# Altium PCB PCB_SMD.PcbDoc
Units mil, origin at the board's own origin, x right, y up, seen from the top; angles counter-clockwise.
Board outline 2386.81 x 2619.09 mil, 2 copper layers (Top Layer, Bottom Layer); 156 components, 34 nets, 411 pads, 42 vias.
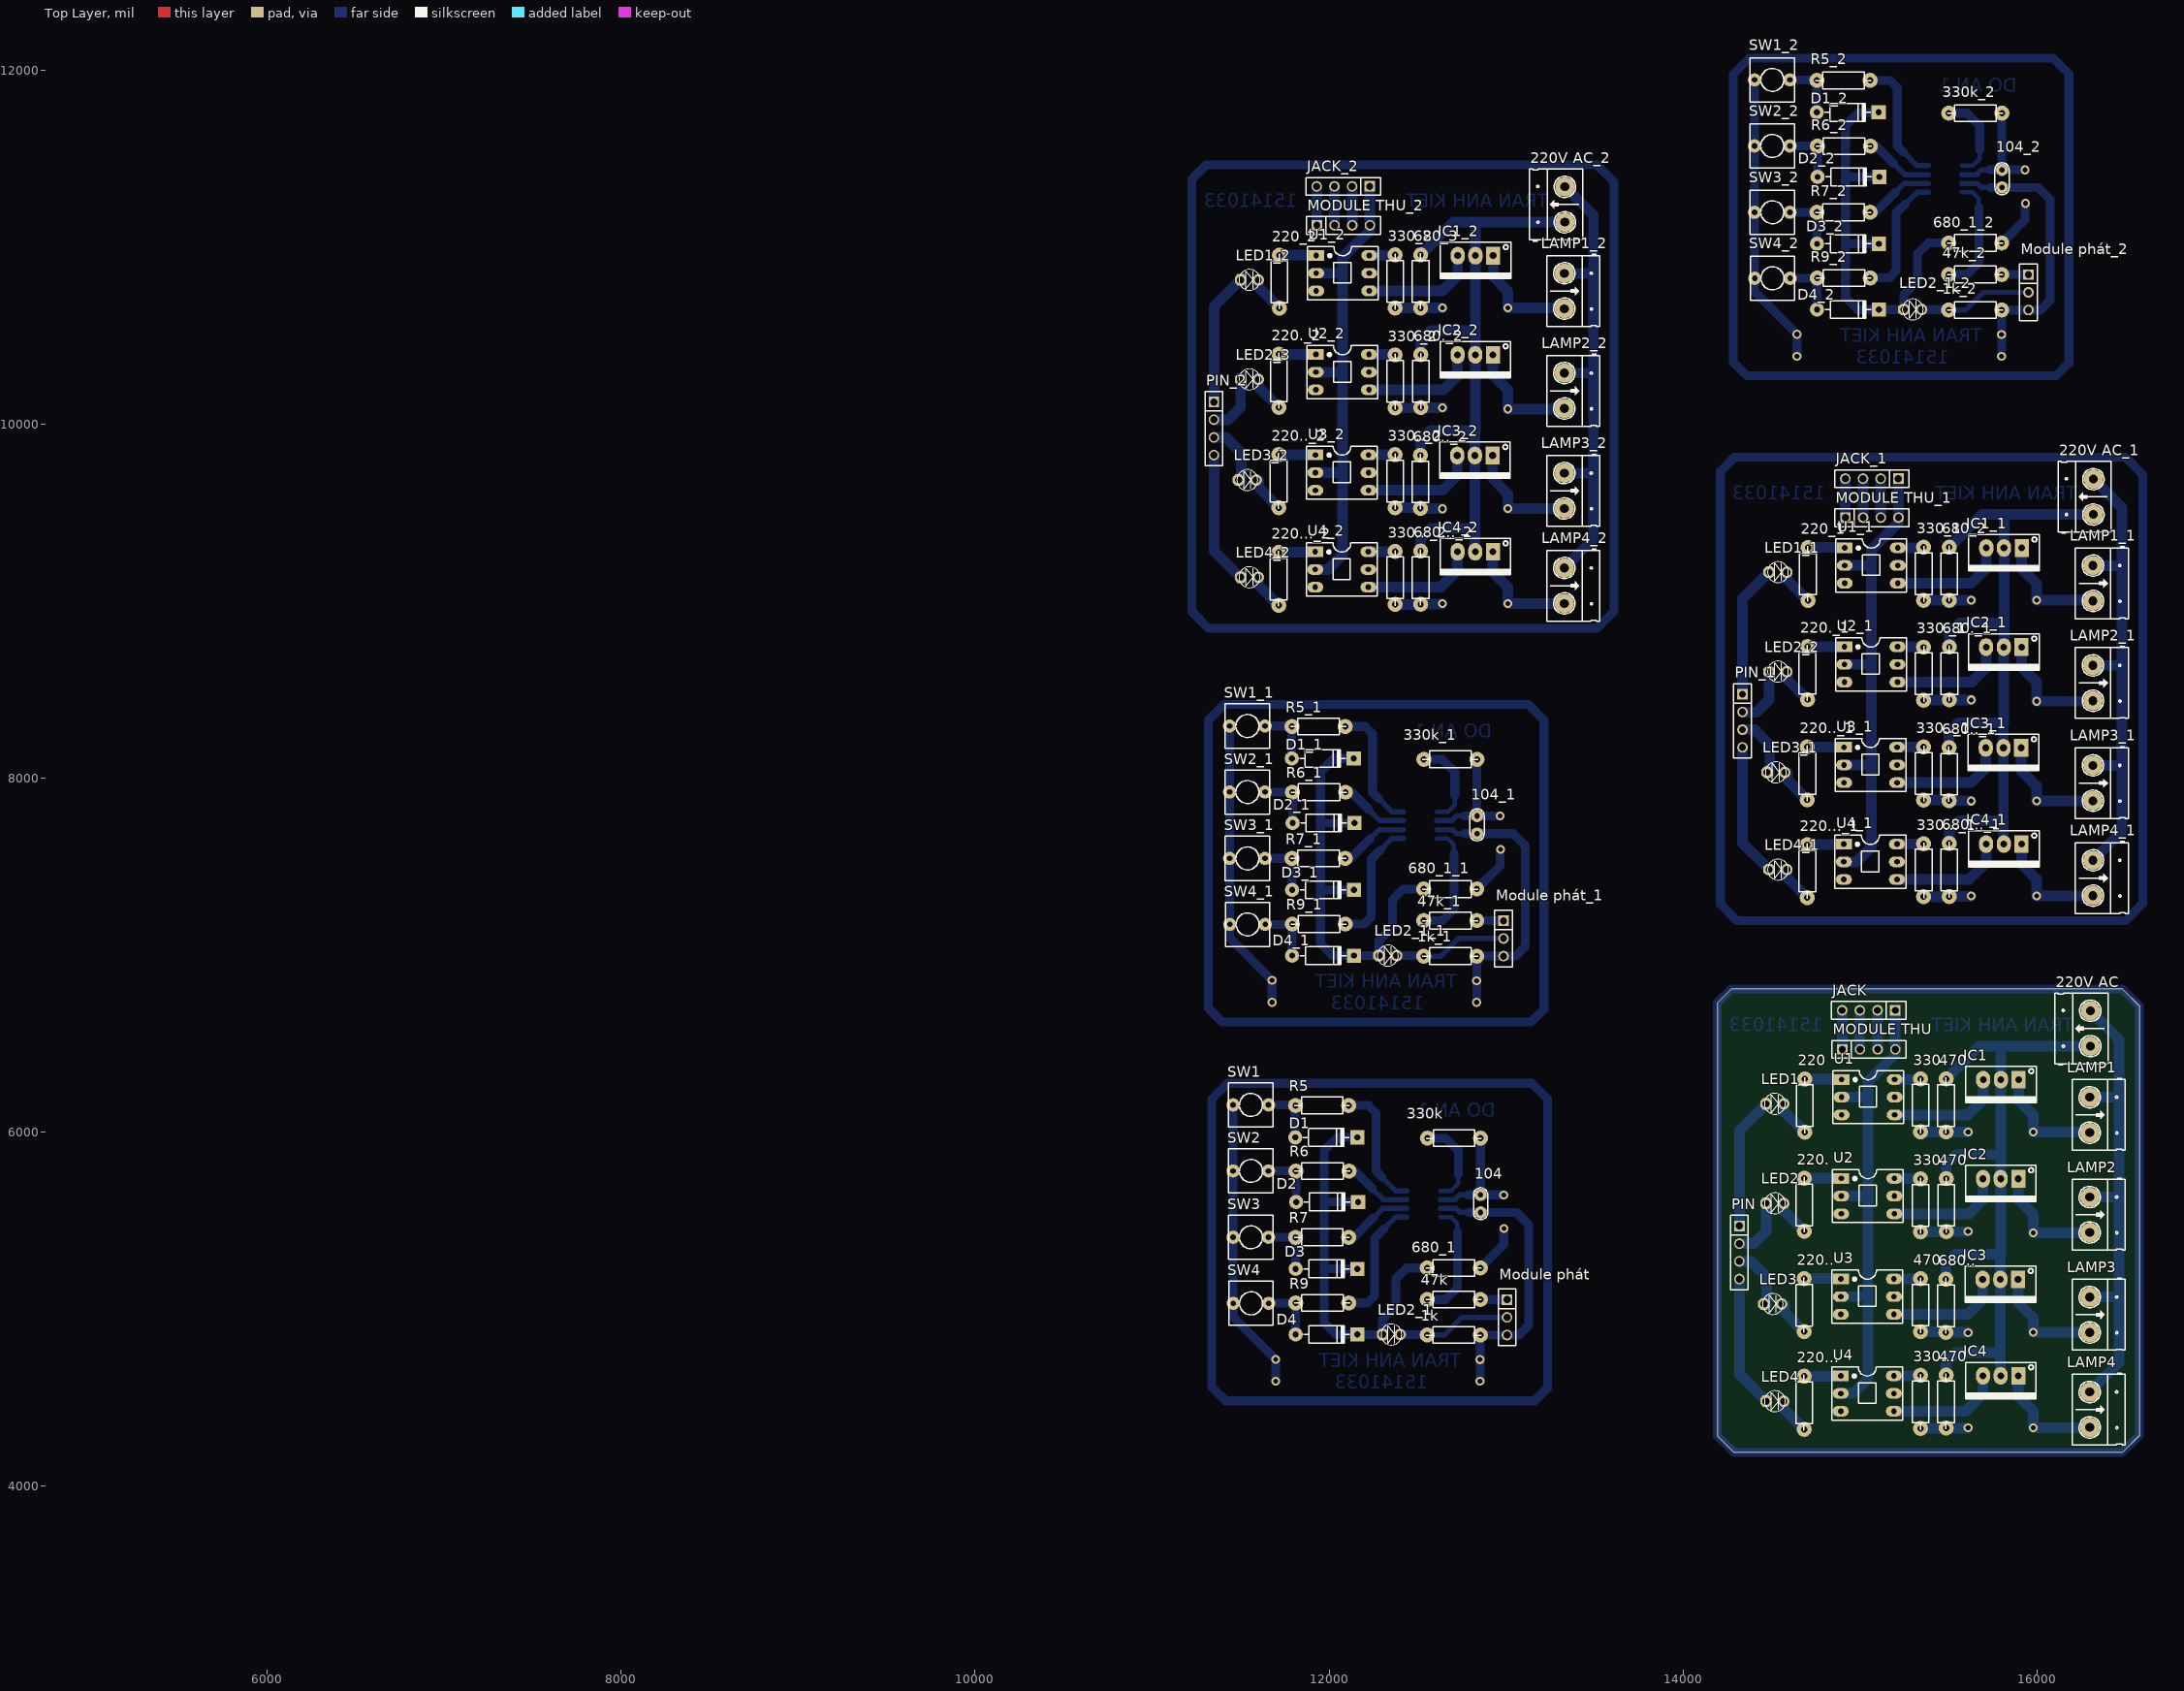
[diagram p0: Top Layer view]
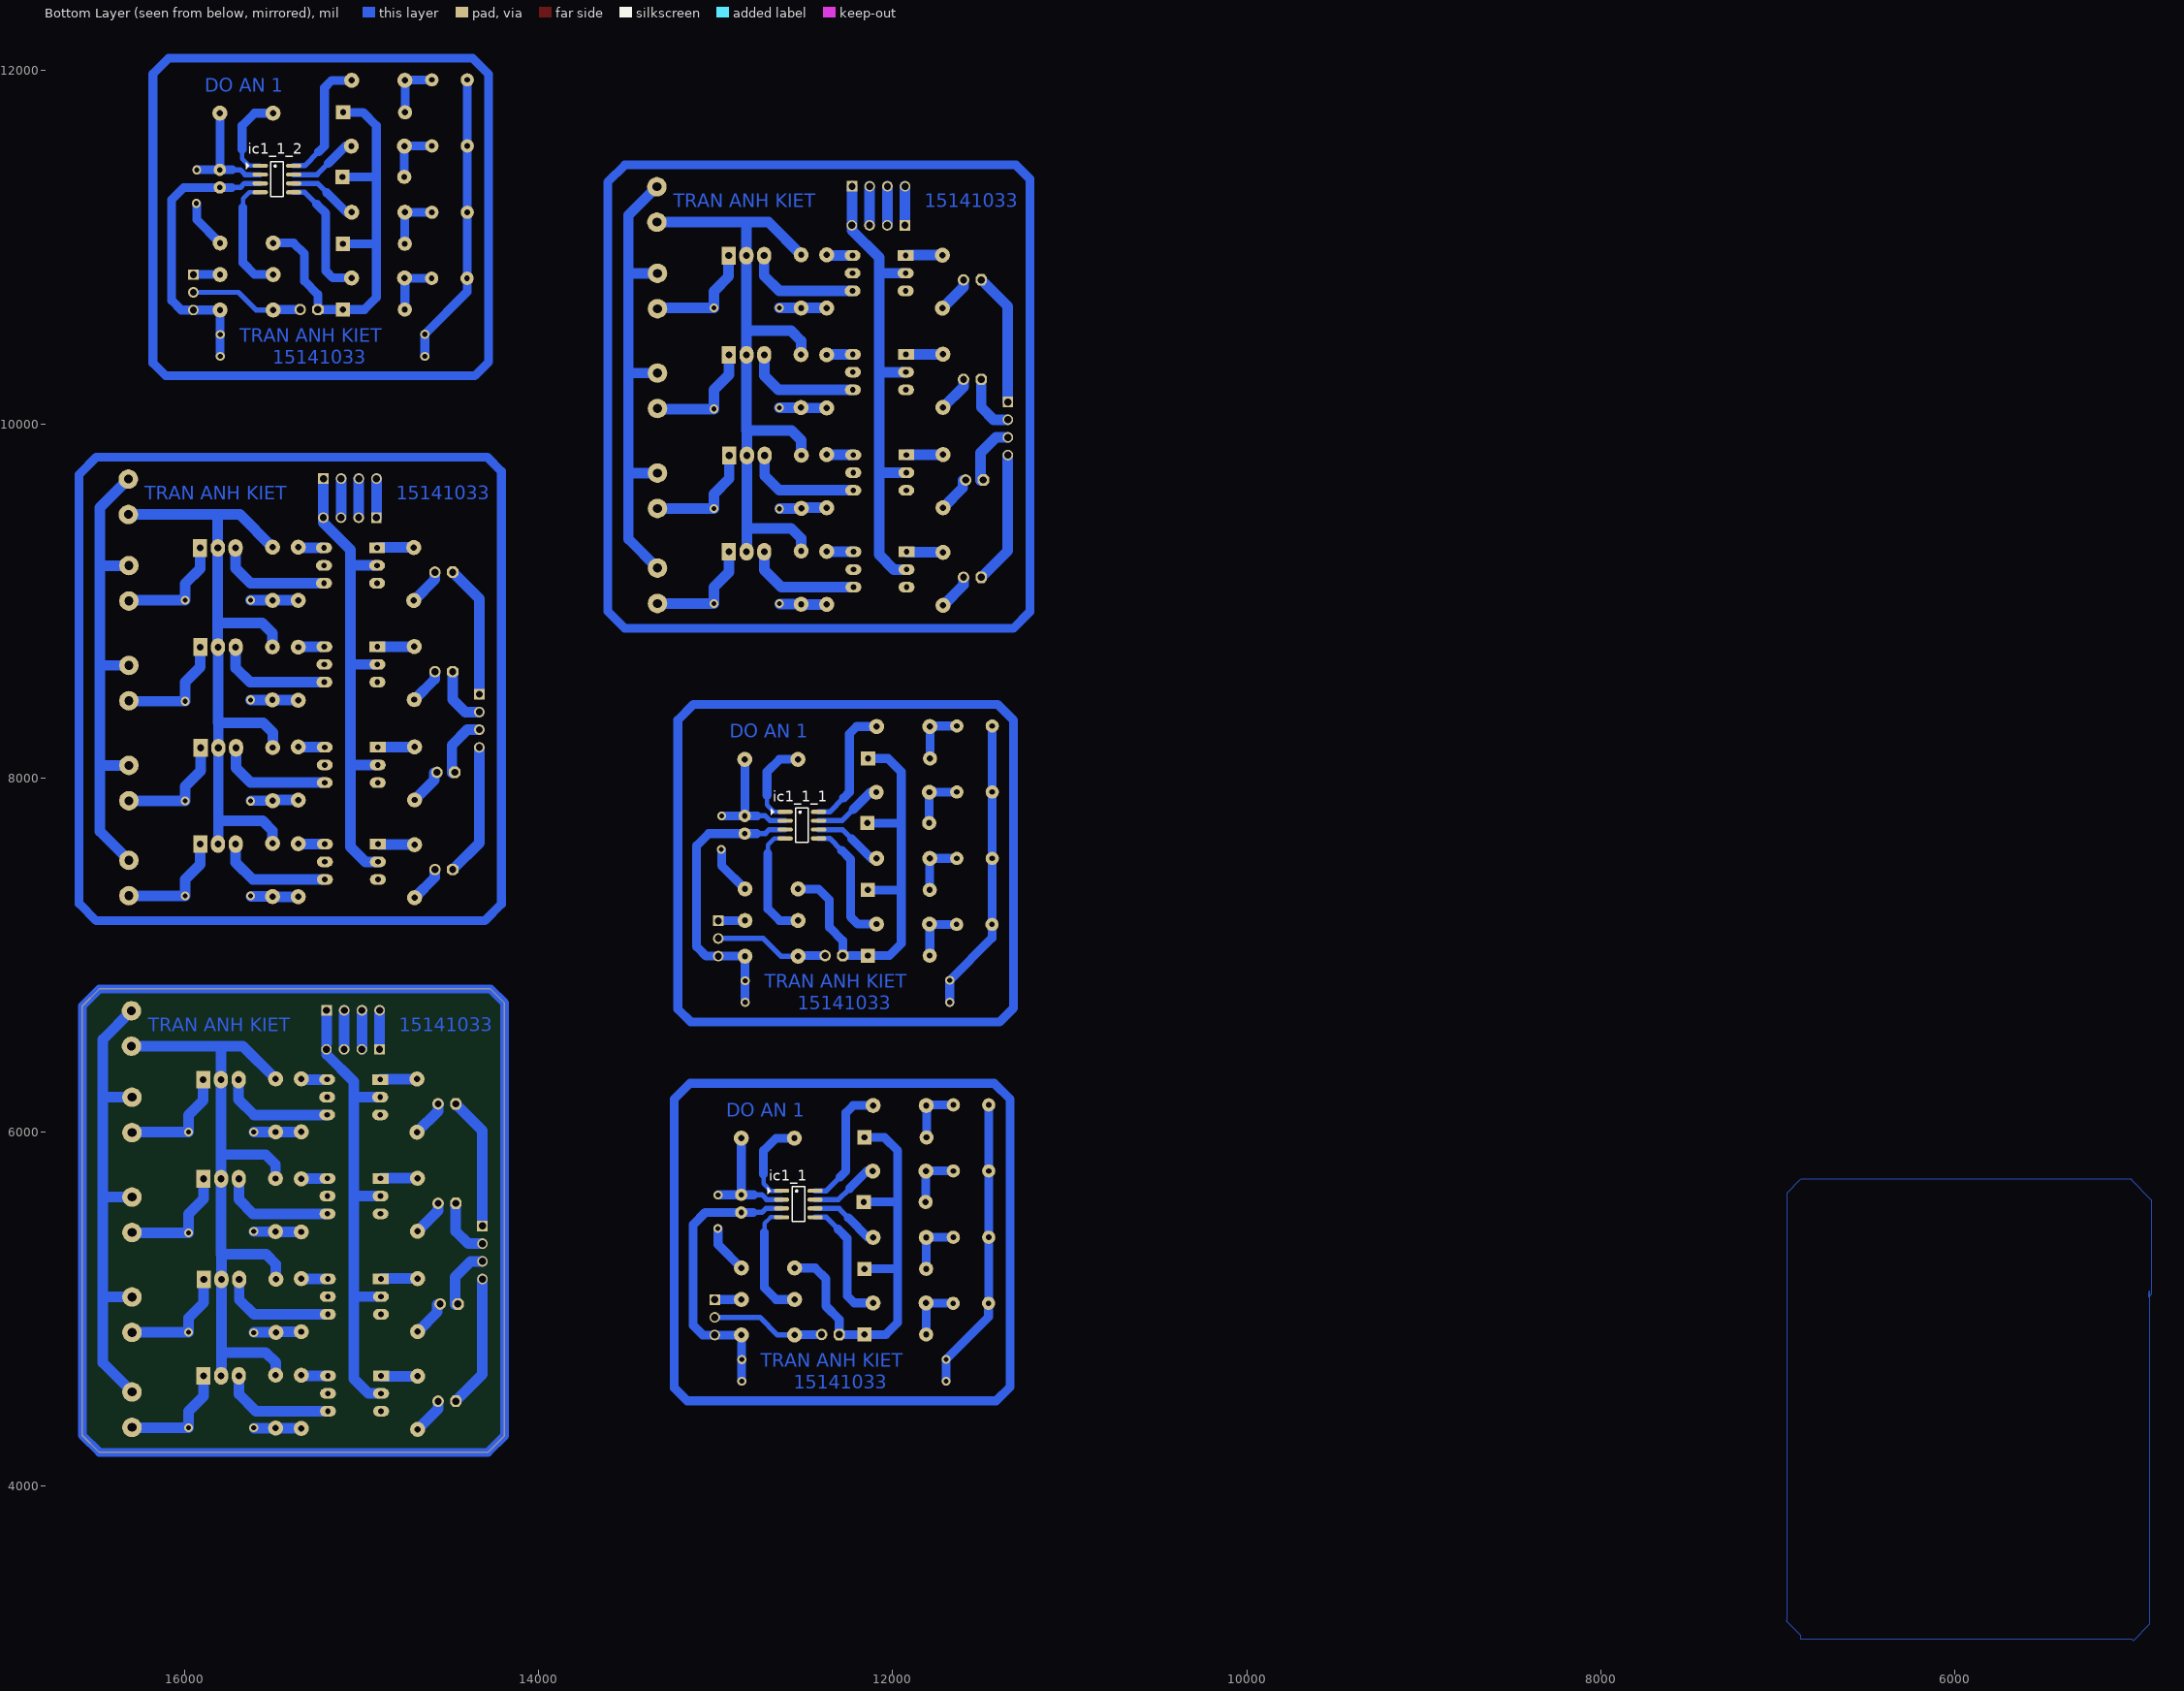
[diagram p1: Bottom Layer view, seen from below]

## Layer stack, top to bottom
Top Layer: signal copper 1.4
Dielectric: dielectric 12.6, FR-4, Dk 4.8
Bottom Layer: signal copper 1.4

## Board outline
14193.9,4284.45 14288.39,4189.96 16483.27,4189.96 16580.71,4287.4 16580.71,6711.61 16483.27,6809.06 14273.62,6809.06 14193.9,6729.33

## Design rules (kind name [scope] priority, off if disabled: settings)
Clearance [All] p1: gap=10
PlaneClearance [All] p1: clearance=50
PolygonConnect [All] p1: connectstyle=Relief reliefconductorwidth=10 reliefentries=4 polygonreliefangle="90 Angle"
RoomDefinition SCH_SMD [InComponentClass('SCH_SMD')] p1: confinementstyle=ConfineIn formatcopy=TRUE lockcomponents=FALSE outline 7103.19,1034.81 16018.19,1034.81 16018.19,2034.81 7103.19,2034.81
RoutingVias [All] p1: holewidth=28 width=50 viastyle="Through Hole" minholewidth=28 minwidth=50 maxholewidth=28 maxwidth=50
SilkscreenOverComponentPads [All] p1: minsilkscreentomaskgap=10
SolderMaskExpansion [All] p1: expansion=4
Width [All] p1: maxlimit=60 minlimit=10 preferedwidth=50
26 further rules are at their usual default settings.

## Classes and differential pairs
component class SCH_SMD: 220 220. 220.. 220... "220V AC" 330 330. 330... 470 680.. IC1 IC2 IC3 IC4 JACK LAMP1 LAMP2 LAMP3 LAMP4 LED1 LED2 LED4 "MODULE THU" PIN U1 U2 U3 U4

## Components (designator, comment, footprint, x,y, rotation, side; value= is the part's Value field where it differs from the comment)
1k "Res" RES-1/4W-SMALL 12694.88,4853.35 r0 top
1k_1 "Res" RES-1/4W-SMALL 12675.2,6994.1 r0 top (schematic designator 1k)
1k_2 "Res" RES-1/4W-SMALL 15641.73,10644.69 r0 top (schematic designator 1k)
47k "Res" RES-1/4W-SMALL 12694.88,5054.13 r0 top
47k_1 "Res" RES-1/4W-SMALL 12675.2,7194.88 r0 top (schematic designator 47k)
47k_2 "Res" RES-1/4W-SMALL 15641.73,10845.47 r0 top (schematic designator 47k)
104 "104" CN1 12856.3,5645.67 r270 top
104_1 "104" CN1 12836.61,7786.42 r270 top (schematic designator 104)
104_2 "104" CN1 15803.15,11437.01 r270 top (schematic designator 104)
220 "Res" RES-1/4W-SMALL 14688.98,6159.45 r270 top
220. "Res" RES-1/4W-SMALL 14686.02,5599.41 r270 top
220.. "Res" RES-1/4W-SMALL 14685.04,5032.48 r270 top
220... "Res" RES-1/4W-SMALL 14685.04,4480.31 r270 top
220..._1 "Res" RES-1/4W-SMALL 14702.76,7484.25 r270 top (schematic designator 220...)
220..._2 "Res" RES-1/4W-SMALL 11715.55,9135.83 r270 top (schematic designator 220...)
220.._1 "Res" RES-1/4W-SMALL 14702.76,8036.42 r270 top (schematic designator 220..)
220.._2 "Res" RES-1/4W-SMALL 11715.55,9687.99 r270 top (schematic designator 220..)
220._1 "Res" RES-1/4W-SMALL 14703.74,8603.35 r270 top (schematic designator 220.)
220._2 "Res" RES-1/4W-SMALL 11716.54,10254.92 r270 top (schematic designator 220.)
220_1 "Res" RES-1/4W-SMALL 14706.69,9163.39 r270 top (schematic designator 220)
220_2 "Res" RES-1/4W-SMALL 11719.49,10814.96 r270 top (schematic designator 220)
"220V AC" "Header 2_1" HED2 16302.17,6485.24 r90 top
"220V AC_1" "Header 2_1" HED2 16319.88,9489.17 r90 top (schematic designator "220V AC")
"220V AC_2" "Header 2_1" HED2 13332.68,11140.75 r90 top (schematic designator "220V AC")
330 "Res" RES-1/4W-SMALL 15342.52,6140.75 r90 top
330. "Res" RES-1/4W-SMALL 15342.52,5575.79 r90 top
330... "Res" RES-1/4W-SMALL 15342.52,4465.55 r90 top
330..._1 "Res" RES-1/4W-SMALL 15360.24,7469.49 r90 top (schematic designator 330...)
330..._2 "Res" RES-1/4W-SMALL 12373.03,9121.06 r90 top (schematic designator 330...)
330.._1 "Res" RES-1/4W-SMALL 15360.24,8015.75 r90 top (schematic designator 330..)
330.._2 "Res" RES-1/4W-SMALL 12373.03,9667.32 r90 top (schematic designator 330..)
330._1 "Res" RES-1/4W-SMALL 15360.24,8579.72 r90 top (schematic designator 330.)
330._2 "Res" RES-1/4W-SMALL 12373.03,10231.3 r90 top (schematic designator 330.)
330_1 "Res" RES-1/4W-SMALL 15360.24,9144.69 r90 top (schematic designator 330)
330_2 "Res" RES-1/4W-SMALL 12373.03,10796.26 r90 top (schematic designator 330)
330k "Res" RES-1/4W-SMALL 12695.87,5965.55 r0 top
330k_1 "Res" RES-1/4W-SMALL 12676.18,8106.3 r0 top (schematic designator 330k)
330k_2 "Res" RES-1/4W-SMALL 15642.72,11756.89 r0 top (schematic designator 330k)
470 "Res" RES-1/4W-SMALL 15342.52,5011.81 r90 top (schematic designator 330..)
470 "Res" RES-1/4W-SMALL 15488.19,5597.44 r270 top (schematic designator 680.)
470 "Res" RES-1/4W-SMALL 15487.21,4487.2 r270 top (schematic designator 680...)
470 "Res" RES-1/4W-SMALL 15487.21,6160.43 r270 top (schematic designator 680)
680.. "Res" RES-1/4W-SMALL 15486.22,5028.54 r270 top
680..._1 "Res" RES-1/4W-SMALL 15504.92,7491.14 r270 top (schematic designator 680...)
680..._2 "Res" RES-1/4W-SMALL 12517.72,9142.72 r270 top (schematic designator 680...)
680.._1 "Res" RES-1/4W-SMALL 15503.94,8032.48 r270 top (schematic designator 680..)
680.._2 "Res" RES-1/4W-SMALL 12516.73,9684.06 r270 top (schematic designator 680..)
680._1 "Res" RES-1/4W-SMALL 15505.91,8601.38 r270 top (schematic designator 680.)
680._2 "Res" RES-1/4W-SMALL 12518.7,10252.95 r270 top (schematic designator 680.)
680_1 "Res" RES-1/4W-SMALL 12694.88,5232.28 r0 top (schematic designator 680)
680_1_1 "Res" RES-1/4W-SMALL 12675.2,7373.03 r0 top (schematic designator 680)
680_1_2 "Res" RES-1/4W-SMALL 15641.73,11023.62 r0 top (schematic designator 680)
680_2 "Res" RES-1/4W-SMALL 15504.92,9164.37 r270 top (schematic designator 680)
680_3 "Res" RES-1/4W-SMALL 12517.72,10815.95 r270 top (schematic designator 680)
D1 "1N4007" D1A 11809.06,5969.89 r180 top
D1_1 "1N4007" D1A 11789.37,8110.63 r180 top (schematic designator D1)
D1_2 "1N4007" D1A 14755.91,11761.23 r180 top (schematic designator D1)
D2 "1N4007" D1A 11813.98,5605.32 r180 top
D2_1 "1N4007" D1A 11794.29,7746.06 r180 top (schematic designator D2)
D2_2 "1N4007" D1A 14760.83,11396.65 r180 top (schematic designator D2)
D3 "1N4007" D1A 11811.02,5227.36 r180 top
D3_1 "1N4007" D1A 11791.34,7368.11 r180 top (schematic designator D3)
D3_2 "1N4007" D1A 14757.87,11018.7 r180 top (schematic designator D3)
D4 "1N4007" D1A 11811.02,4856.3 r180 top
D4_1 "1N4007" D1A 11791.34,6997.05 r180 top (schematic designator D4)
D4_2 "1N4007" D1A 14757.87,10647.64 r180 top (schematic designator D4)
IC1 "BTA16" QTO-220 15896.65,6296.26 r180 top
IC1_1 "BTA16" QTO-220 15914.37,9300.2 r180 top (schematic designator IC1)
ic1_1 "ev1527" SO-8 12533.46,5593.5 r180 bottom (schematic designator ic1)
ic1_1_1 "ev1527" SO-8 12513.78,7734.25 r180 bottom (schematic designator ic1)
ic1_1_2 "ev1527" SO-8 15480.32,11384.84 r180 bottom (schematic designator ic1)
IC1_2 "BTA16" QTO-220 12927.17,10951.77 r180 top (schematic designator IC1)
IC2 "BTA16" QTO-220 15895.67,5736.22 r180 top
IC2_1 "BTA16" QTO-220 15913.39,8740.16 r180 top (schematic designator IC2)
IC2_2 "BTA16" QTO-220 12926.18,10391.73 r180 top (schematic designator IC2)
IC3 "BTA16" QTO-220 15893.7,5167.32 r180 top
IC3_1 "BTA16" QTO-220 15911.42,8171.26 r180 top (schematic designator IC3)
IC3_2 "BTA16" QTO-220 12924.21,9822.83 r180 top (schematic designator IC3)
IC4 "BTA16" QTO-220 15895.67,4623.03 r180 top
IC4_1 "BTA16" QTO-220 15913.39,7626.97 r180 top (schematic designator IC4)
IC4_2 "BTA16" QTO-220 12926.18,9278.54 r180 top (schematic designator IC4)
JACK "JP4" JP4-C1T 15199.8,6687.99 r180 top
JACK_1 "JP4" JP4-C1T 15217.52,9691.93 r180 top (schematic designator JACK)
JACK_2 "JP4" JP4-C1T 12230.32,11343.5 r180 top (schematic designator JACK)
LAMP1 "Header 2_1" HED2 16299.21,6196.85 r270 top
LAMP1_1 "Header 2_1" HED2 16316.93,9200.79 r270 top (schematic designator LAMP1)
LAMP1_2 "Header 2_1" HED2 13329.72,10852.36 r270 top (schematic designator LAMP1)
LAMP2 "Header 2_1" HED2 16299.21,5632.87 r270 top
LAMP2_1 "Header 2_1" HED2 16316.93,8636.81 r270 top (schematic designator LAMP2)
LAMP2_2 "Header 2_1" HED2 13329.72,10288.39 r270 top (schematic designator LAMP2)
LAMP3 "Header 2_1" HED2 16299.21,5067.91 r270 top
LAMP3_1 "Header 2_1" HED2 16316.93,8071.85 r270 top (schematic designator LAMP3)
LAMP3_2 "Header 2_1" HED2 13329.72,9723.43 r270 top (schematic designator LAMP3)
LAMP4 "Header 2_1" HED2 16299.21,4531.5 r270 top
LAMP4_1 "Header 2_1" HED2 16316.93,7535.43 r270 top (schematic designator LAMP4)
LAMP4_2 "Header 2_1" HED2 13329.72,9187.01 r270 top (schematic designator LAMP4)
LED1 "LED" LED-3MM-YELLOW 14469.49,6159.45 r0 top
LED1_1 "LED" LED-3MM-YELLOW 14487.2,9163.39 r0 top (schematic designator LED1)
LED1_2 "LED" LED-3MM-YELLOW 11500,10814.96 r0 top (schematic designator LED1)
LED2 "LED" LED-3MM-YELLOW 14469.49,5597.44 r0 top
LED2_1 "LED" LED-3MM-YELLOW 12302.17,4856.3 r0 top (schematic designator LED2)
LED2_1_1 "LED" LED-3MM-YELLOW 12282.48,6997.05 r0 top (schematic designator LED2)
LED2_1_2 "LED" LED-3MM-YELLOW 15249.02,10647.64 r0 top (schematic designator LED2)
LED2_2 "LED" LED-3MM-YELLOW 14487.2,8601.38 r0 top (schematic designator LED2)
LED2_3 "LED" LED-3MM-YELLOW 11500,10252.95 r0 top (schematic designator LED2)
LED3 "LED" LED-3MM-YELLOW 14457.68,5028.54 r0 top
LED3_1 "LED" LED-3MM-YELLOW 14475.39,8032.48 r0 top (schematic designator LED3)
LED3_2 "LED" LED-3MM-YELLOW 11488.19,9684.06 r0 top (schematic designator LED3)
LED4 "LED" LED-3MM-YELLOW 14469.49,4479.33 r0 top
LED4_1 "LED" LED-3MM-YELLOW 14487.2,7483.27 r0 top (schematic designator LED4)
LED4_2 "LED" LED-3MM-YELLOW 11500,9134.84 r0 top (schematic designator LED4)
"Module phát" "JP3" JP3-C1T 13005.91,5053.15 r270 top
"Module phát_1" "JP3" JP3-C1T 12986.22,7193.9 r270 top (schematic designator "Module phát")
"Module phát_2" "JP3" JP3-C1T 15952.76,10844.49 r270 top (schematic designator "Module phát")
"MODULE THU" "JP4" JP4-C1T 14900.59,6467.52 r0 top
"MODULE THU_1" "JP4" JP4-C1T 14918.31,9471.46 r0 top (schematic designator "MODULE THU")
"MODULE THU_2" "JP4" JP4-C1T 11931.1,11123.03 r0 top (schematic designator "MODULE THU")
PIN "JP4" JP4-C1T 14318.9,5469.49 r270 top
PIN_1 "JP4" JP4-C1T 14336.61,8473.43 r270 top (schematic designator PIN)
PIN_2 "JP4" JP4-C1T 11349.41,10125 r270 top (schematic designator PIN)
R5 "Res" RES-1/4W-SMALL 11950.79,6150.59 r0 top
R5_1 "Res" RES-1/4W-SMALL 11931.1,8291.34 r0 top (schematic designator R5)
R5_2 "Res" RES-1/4W-SMALL 14897.64,11941.93 r0 top (schematic designator R5)
R6 "Res" RES-1/4W-SMALL 11952.76,5779.53 r0 top
R6_1 "Res" RES-1/4W-SMALL 11933.07,7920.28 r0 top (schematic designator R6)
R6_2 "Res" RES-1/4W-SMALL 14899.61,11570.87 r0 top (schematic designator R6)
R7 "Res" RES-1/4W-SMALL 11950.79,5405.51 r0 top
R7_1 "Res" RES-1/4W-SMALL 11931.1,7546.26 r0 top (schematic designator R7)
R7_2 "Res" RES-1/4W-SMALL 14897.64,11196.85 r0 top (schematic designator R7)
R9 "Res" RES-1/4W-SMALL 11951.77,5034.45 r0 top
R9_1 "Res" RES-1/4W-SMALL 11932.09,7175.2 r0 top (schematic designator R9)
R9_2 "Res" RES-1/4W-SMALL 14898.62,10825.79 r0 top (schematic designator R9)
SW1 "" SW2 11657.7,6153.52 r180 top
SW1_1 "" SW2 11638.01,8294.27 r180 top (schematic designator SW1)
SW1_2 "" SW2 14604.55,11944.86 r180 top (schematic designator SW1)
SW2 "" SW2 11657.7,5780.49 r180 top
SW2_1 "" SW2 11638.01,7921.23 r180 top (schematic designator SW2)
SW2_2 "" SW2 14604.55,11571.82 r180 top (schematic designator SW2)
SW3 "" SW2 11657.7,5405.49 r180 top
SW3_1 "" SW2 11638.01,7546.23 r180 top (schematic designator SW3)
SW3_2 "" SW2 14604.55,11196.82 r180 top (schematic designator SW3)
SW4 "" SW2 11658.68,5032.45 r180 top
SW4_1 "" SW2 11639,7173.2 r180 top (schematic designator SW4)
SW4_2 "" SW2 14605.53,10823.79 r180 top (schematic designator SW4)
U1 "MOC3021" DIP6/W0.3 14896.65,6297.24 r270 top
U1_1 "MOC3021" DIP6/W0.3 14914.37,9301.18 r270 top (schematic designator U1)
U1_2 "MOC3021" DIP6/W0.3 11927.17,10952.76 r270 top (schematic designator U1)
U2 "MOC3021" DIP6/W0.3 14894.69,5738.19 r270 top
U2_1 "MOC3021" DIP6/W0.3 14912.4,8742.13 r270 top (schematic designator U2)
U2_2 "MOC3021" DIP6/W0.3 11925.2,10393.7 r270 top (schematic designator U2)
U3 "MOC3021" DIP6/W0.3 14892.72,5170.28 r270 top
U3_1 "MOC3021" DIP6/W0.3 14910.43,8174.21 r270 top (schematic designator U3)
U3_2 "MOC3021" DIP6/W0.3 11923.23,9825.79 r270 top (schematic designator U3)
U4 "MOC3021" DIP6/W0.3 14891.73,4623.03 r270 top
U4_1 "MOC3021" DIP6/W0.3 14909.45,7626.97 r270 top (schematic designator U4)
U4_2 "MOC3021" DIP6/W0.3 11922.24,9278.54 r270 top (schematic designator U4)

## Footprints (in the part's own frame and the unit in brackets; to place one, negate y for a bottom-side part, rotate by r counter-clockwise, add the part's x,y. Pads: shape width x height; smd on the part's side, far side on the other; paste and mask are expansions set on the pad)
CN1 [mil]
  round 70 hole 31: 1(0,0) 2(100,0)
  silkscreen extent -40,-40 141,40, body extent -60,-30 170,37, height 265
D1A [mil] "Diode 1A, W 100mil, L 350mil"
  round 80 hole 35: 1(0,0)
  rect 80x80 hole 35: 2(-350,0)
  silkscreen extent -305,-50 -45,50, body extent -386,-33 34,36, height 84
DIP6/W0.3 [mil] "6 PIN, W 300mil, Pin to pin 100mil"
  rect 60x90 hole 31.5: 1(0,0)
  oval 60x90 hole 31.5: 2(100,0) 3(200,0) 4(200,300) 5(100,300) 6(0,300)
  silkscreen extent -50,-50 250,350, body extent -58,-7 260,307, height 170
HED2 [mil] "Header 2, 2 pin, hight 300mil, Pin to Pin 200, Colour Green"
  round 110 hole 50: 1(0,0) 2(200,0)
  silkscreen extent -106,-100 300,200, body extent -92,-140 302,155, height 394
JP3-C1T [mm] "3 row, straight, gold plating"
  rect 1.52x1.52 hole 1.02: 1(0,0)
  round 1.52 hole 1.02: 2(2.54,0) 3(5.08,0)
  silkscreen extent -1.52,-1.27 6.6,1.27, body extent -1.52,-1.25 6.6,1.25, height 8.51
JP4-C1T [mm] "4 row, straight, gold plating"
  rect 1.52x1.52 hole 1.02: 1(0,0)
  round 1.52 hole 1.02: 2(2.54,0) 3(5.08,0) 4(7.62,0)
  silkscreen extent -1.52,-1.27 9.14,1.27, body extent -1.52,-1.25 9.14,1.25, height 8.51
LED-3MM-YELLOW [mil]
  oct 65x65 hole 40: 1(0,0)
  round 65 hole 40: 2(100,0)
  silkscreen extent -9,-59 109,59, body extent -27,-77 117,80, height 181
QTO-220 [mil] "TO-220 - 1-2-3"
  rect 80x100 hole 39: 1(0,0)
  oval 80x100 hole 39: 2(100,0) 3(200,0)
  silkscreen extent -100,-76 300,130, body extent -119,-64 322,121, height 755
RES-1/4W-SMALL [mil]
  round 85 hole 35: 1(-140,0) 2(160,0)
  silkscreen extent -148,-47 166,47, body extent -152,-47 172,47, height 97
SO-8 [mm] "8-Pin Small Outline Integrated Circuit 1.27 mm Pitch, IPC Medium Density"
  oval 2.2x0.6 smd: 1(-2.4,1.905) 2(-2.4,0.635) 3(-2.4,-0.635) 4(-2.4,-1.905) 5(2.4,-1.905) 6(2.4,-0.635) 7(2.4,0.635) 8(2.4,1.905)
  silkscreen extent -4.44,-2.5 0.9,2.5, body extent -2.93,-2.51 3.08,2.49, height 1.75
SW2 [mil] "SW button 2pin, 250x 250 mil"
  round 75 hole 31: 1(0,0) 2(200,0)
  silkscreen extent -25,-125 225,125

## Part data
104 104_1 104_2: library part CN1, "Cap np  1pF - 472pF"
"220V AC" "220V AC_1" "220V AC_2" LAMP1 LAMP1_1 LAMP1_2 LAMP2 LAMP2_1 LAMP2_2 LAMP3 LAMP3_1 LAMP3_2 LAMP4 LAMP4_1 LAMP4_2: "Header, 2-Pin"
D1 D1_1 D1_2 D2 D2_1 D2_2 D3 D3_1 D3_2 D4 D4_1 D4_2: library part D1A, "Diode 1A"
IC1 IC1_1 IC1_2 IC2 IC2_1 IC2_2 IC3 IC3_1 IC3_2 IC4 IC4_1 IC4_2: library part BT137, "Triacs - 8A"
ic1_1 ic1_1_1 ic1_1_2: library part FDS4435A, "P-Channel Logic Level PowerTrench MOSFET"
JACK JACK_1 JACK_2 "Module phát" "Module phát_1" "Module phát_2" "MODULE THU" "MODULE THU_1" "MODULE THU_2" PIN PIN_1 PIN_2: "WR-PHD 2.54 mm Angled Socket Header"
LED1 LED1_1 LED1_2 LED2 LED2_1 LED2_1_1 LED2_1_2 LED2_2 LED2_3 LED3 LED3_1 LED3_2 LED4 LED4_1 LED4_2: "LED Single colour Green and Red"
SW1 SW1_1 SW1_2 SW2 SW2_1 SW2_2 SW3 SW3_1 SW3_2 SW4 SW4_1 SW4_2: library part SW2, "Switch button 2 pin"
U1 U1_1 U1_2 U2 U2_1 U2_2 U3 U3_1 U3_2 U4 U4_1 U4_2: "Single Opto"

## Via types
v1: diameter 50, hole 28, Top Layer to Bottom Layer, 42 vias

## Nets (pads, with @x,y where several pads share a name; then routed paths per layer and width w, separated by ;. In a path a pad name is that pad's centre, name@x,y a point inside that pad or via, vN(x,y) a via of type N, cw(c..) or ccw(c..) an arc to the next point about the centre after c; other vN are vias at no path point)
GND: "MODULE THU.4" JACK.1 U1.2 U2.2 U3.2 U4.2 | length 2973.2
  Bottom Layer w60: U4.2 14962.99,4523.03 15046.26,4606.3 15046.26,5070.28 ; U3.2 15046.26,5070.28 ; U2.2 15046.26,5638.19 ; U1.2 15041.93,6197.24 ; 15199.8,6499.03 JACK.1 ; JACK.1@15200.59,6687.2 15200.59,6467.52 15200.59,6439.76 15046.26,6285.43 15046.26,5638.19 ; 15046.26,5070.28 15046.26,5638.19
Net104_1: IC4.1 LAMP4.2 | length 645.5
  Bottom Layer w60: IC4.1 15895.67,4507.87 15980.32,4423.23 v1(15980.32,4329.72) LAMP4.2@16297.44,4329.72
Net104_2: 330....1 470.2@15487.21,4327.2 | length 264.5
  Bottom Layer w60: 330....1 470.2@15485.55,4325.55 ; 470.2@15487.21,4327.2 v1@15608.7,4327.2
  other v1: 15611.22,4329.72
Net220..._1: 220....1 U4.1 | length 207.8
  Bottom Layer w60: 220....1 14889.02,4620.31 U4.1
Net220..._2: 220....2 LED4.2 | length 206.9
  Bottom Layer w60: LED4.2 14569.49,4435.87 220....2
Net220.._1: 220...1 U3.1 | length 205.5
  Bottom Layer w60: 220...1 U3.1@14890.51,5172.48
Net220.._2: 220...2 LED3.2 | length 199.3
  Bottom Layer w60: LED3.2@14573.43,5025.59 14573.43,4984.09 220...2
Net220._1: 220..1 U2.1 | length 207.4
  Bottom Layer w60: 220..1 U2.1@14893.46,5739.41
Net220._2: 220..2 LED2.2 | length 206.3
  Bottom Layer w60: LED2.2 14569.49,5555.94 220..2
Net220_1: 220.1 U1.1 | length 205.5
  Bottom Layer w60: 220.1 U1.1@14894.45,6299.45
Net220_2: 220.2 LED1.2 | length 209.5
  Bottom Layer w60: LED1.2 14569.49,6118.94 220.2
"Net220V AC_1": 470.1@15487.21,4627.2 470.1@15487.21,6300.43 470.1@15488.19,5737.44 680...1 "220V AC.1" IC1.2 IC2.2 IC3.2 IC4.2 | length 3978.7
  Bottom Layer w60: 680...1 15486.22,5253.94 15541.34,5309.06 15795.67,5309.06 IC2.2 ; 470.1@15487.21,4627.2 15487.21,4698.82 15543.31,4754.92 15793.7,4754.92 ; 470.1@15487.21,6300.43 15672.01,6485.24 16302.17,6485.24 ; 470.1@15488.19,5737.44 15488.19,5815.94 15545.28,5873.03 15796.65,5873.03 IC2.2@15796.65,5737.2 ; 15793.7,5307.09 IC3.2 15793.7,4754.92 ; IC4.2 15793.7,4625 15793.7,4754.92 ; 15796.65,5875 IC1.2 15796.65,6484.65
"Net220V AC_2": "220V AC.2" LAMP1.1 LAMP2.1 LAMP3.1 LAMP4.1 | length 2778.8
  Bottom Layer w60: LAMP4.1 16463.58,4695.87 16463.58,5632.87 ; LAMP3.1 16462.6,5067.91 ; LAMP2.1 16463.58,5632.87 ; LAMP1.1 16461.61,6196.85 ; 16302.17,6685.24 16463.58,6523.82 16463.58,5632.87
Net330..._2: 330....2 U4.6 | length 148.3
  Bottom Layer w60: U4.6 330....2@15340,4623.03
Net330.._1: 470.1@15342.52,4871.81 680...2 | length 265.2
  Bottom Layer w60: 470.1@15342.52,4871.81 680...2@15482.95,4871.81 ; 680...2@15484.69,4870.08 680...2 v1@15608.82,4868.54
  other v1: 15611.22,4866.14
Net330.._2: 470.2@15342.52,5171.81 U3.6 | length 150.4
  Bottom Layer w60: U3.6 15340.98,5170.28 470.2@15342.52,5171.81
Net330._1: 330..1 470.2@15488.19,5437.44 | length 268.8
  Bottom Layer w60: 330..1 15486.54,5435.79 15488.19,5437.44 v1@15610.67,5437.44
  other v1: 15611.22,5437.99
Net330._2: 330..2 U2.6 | length 145.4
  Bottom Layer w60: U2.6 330..2@15340.12,5738.19
Net330_1: 330.1 470.2@15487.21,6000.43 | length 268.4
  Bottom Layer w60: 330.1 470.2@15486.89,6000.75 ; 470.2@15487.21,6000.43 v1(15611.22,6000.43)
Net330_2: 330.2 U1.6 | length 147.3
  Bottom Layer w60: U1.6 15339.02,6297.24 330.2
NetIC1_1: IC1.1 LAMP1.2 | length 645.8
  Bottom Layer w60: IC1.1 15896.65,6179.13 15980.32,6095.47 v1(15980.32,6000.43) LAMP1.2@16295.63,6000.43
NetIC1_3: IC1.3 U1.4 | length 648.9
  Bottom Layer w60: U1.4 15611.02,6097.24 15696.65,6182.87 IC1.3
NetIC2_1: IC2.1 LAMP2.2 | length 657.3
  Bottom Layer w60: IC2.1 15895.67,5623.03 15980.32,5538.39 v1(15980.32,5430.12) LAMP2.2@16296.46,5430.12
NetIC2_3: IC2.3 U2.4 | length 651.7
  Bottom Layer w60: U2.4 15614.96,5538.19 15695.67,5618.9 IC2.3
NetIC3_1: IC3.1 LAMP3.2 | length 653.8
  Bottom Layer w60: IC3.1 15893.7,5036.42 15980.32,4949.8 v1(15980.32,4868.11) LAMP3.2@16299.02,4868.11
NetIC3_3: IC3.3 U3.4 | length 649.6
  Bottom Layer w60: U3.4 15611.02,4970.28 15693.7,5052.95 IC3.3
NetIC4_3: IC4.3 U4.4 | length 647.4
  Bottom Layer w60: U4.4 15599.21,4423.03 15695.67,4519.49 IC4.3
NetJACK_2: "MODULE THU.3" JACK.2 | length 219.7
  Bottom Layer w60: 15099.8,6468.31 JACK.2
NetJACK_3: "MODULE THU.2" JACK.3 | length 219.7
  Bottom Layer w60: 14999.8,6468.31 JACK.3
NetJACK_4: "MODULE THU.1" JACK.4 | length 219.7
  Bottom Layer w60: 14899.8,6468.31 JACK.4
NetLED1_1: LED1.1 PIN.1 | length 752.3
  Bottom Layer w60: PIN.1 14318.9,6008.86 LED1.1
NetLED2_1: LED2.1 PIN.2 | length 337.3
  Bottom Layer w60: PIN.2 14399.02,5369.49 14469.49,5439.96 LED2.1
NetLED3_1: LED3.1 PIN.3 | length 347.2
  Bottom Layer w60: PIN.3 14386.02,5269.49 14473.43,5182.09 LED3.1@14473.43,5025.59
NetLED4_1: LED4.1 PIN.4 | length 752.5
  Bottom Layer w60: PIN.4 14318.9,4629.92 LED4.1
pads on no net: 1k.1 1k.2 1k_1.1 1k_1.2 1k_2.1 1k_2.2 47k.1 47k.2 47k_1.1 47k_1.2 47k_2.1 47k_2.2 104.1 104.2 104_1.1 104_1.2 104_2.1 104_2.2 220..._1.1 220..._1.2 220..._2.1 220..._2.2 220.._1.1 220.._1.2 220.._2.1 220.._2.2 220._1.1 220._1.2 220._2.1 220._2.2 220_1.1 220_1.2 220_2.1 220_2.2 330..._1.1 330..._1.2 330..._2.1 330..._2.2 330.._1.1 330.._1.2 330.._2.1 330.._2.2 330._1.1 330._1.2 330._2.1 330._2.2 330_1.1 330_1.2 330_2.1 330_2.2 330k.1 330k.2 330k_1.1 330k_1.2 330k_2.1 330k_2.2 680..._1.1 680..._1.2 680..._2.1 680..._2.2 680.._1.1 680.._1.2 680.._2.1 680.._2.2 680._1.1 680._1.2 680._2.1 680._2.2 680_1.1 680_1.2 680_1_1.1 680_1_1.2 680_1_2.1 680_1_2.2 680_2.1 680_2.2 680_3.1 680_3.2 "220V AC_1.1" "220V AC_1.2" "220V AC_2.1" "220V AC_2.2" "Module phát.1" "Module phát.2" "Module phát.3" "Module phát_1.1" "Module phát_1.2" "Module phát_1.3" "Module phát_2.1" "Module phát_2.2" "Module phát_2.3" "MODULE THU_1.1" "MODULE THU_1.2" "MODULE THU_1.3" "MODULE THU_1.4" "MODULE THU_2.1" "MODULE THU_2.2" "MODULE THU_2.3" "MODULE THU_2.4" D1.1 D1.2 D1_1.1 D1_1.2 D1_2.1 D1_2.2 D2.1 D2.2 D2_1.1 D2_1.2 D2_2.1 D2_2.2 D3.1 D3.2 D3_1.1 D3_1.2 D3_2.1 D3_2.2 D4.1 D4.2 D4_1.1 D4_1.2 D4_2.1 D4_2.2 IC1_1.1 ic1_1.1 IC1_1.2 ic1_1.2 ic1_1.3 IC1_1.3 ic1_1.4 ic1_1.5 ic1_1.6 ic1_1.7 ic1_1.8 ic1_1_1.1 ic1_1_1.2 ic1_1_1.3 ic1_1_1.4 ic1_1_1.5 ic1_1_1.6 ic1_1_1.7 ic1_1_1.8 ic1_1_2.1 ic1_1_2.2 ic1_1_2.3 ic1_1_2.4 ic1_1_2.5 ic1_1_2.6 ic1_1_2.7 ic1_1_2.8 IC1_2.1 IC1_2.2 IC1_2.3 IC2_1.1 IC2_1.2 IC2_1.3 IC2_2.1 IC2_2.2 IC2_2.3 IC3_1.1 IC3_1.2 IC3_1.3 IC3_2.1 IC3_2.2 IC3_2.3 IC4_1.1 IC4_1.2 IC4_1.3 IC4_2.1 IC4_2.2 IC4_2.3 JACK_1.1 JACK_1.2 JACK_1.3 JACK_1.4 JACK_2.1 JACK_2.2 JACK_2.3 JACK_2.4 LAMP1_1.1 LAMP1_1.2 LAMP1_2.1 LAMP1_2.2 LAMP2_1.1 LAMP2_1.2 LAMP2_2.1 LAMP2_2.2 LAMP3_1.1 LAMP3_1.2 LAMP3_2.1 LAMP3_2.2 LAMP4_1.1 LAMP4_1.2 LAMP4_2.1 LAMP4_2.2 LED1_1.1 LED1_1.2 LED1_2.1 LED1_2.2 LED2_1.1 LED2_1.2 LED2_1_1.1 LED2_1_1.2 LED2_1_2.1 LED2_1_2.2 LED2_2.1 LED2_2.2 LED2_3.1 LED2_3.2 LED3_1.1 LED3_1.2 LED3_2.1 LED3_2.2 LED4_1.1 LED4_1.2 LED4_2.1 LED4_2.2 PIN_1.1 PIN_1.2 PIN_1.3 PIN_1.4 PIN_2.1 PIN_2.2 PIN_2.3 PIN_2.4 R5.1 R5.2 R5_1.1 R5_1.2 R5_2.1 R5_2.2 R6.1 R6.2 R6_1.1 R6_1.2 R6_2.1 R6_2.2 R7.1 R7.2 R7_1.1 R7_1.2 R7_2.1 R7_2.2 R9.1 R9.2 R9_1.1 R9_1.2 R9_2.1 R9_2.2 SW1.1 SW1.2 SW1_1.1 SW1_1.2 SW1_2.1 SW1_2.2 SW2.1 SW2.2 SW2_1.1 SW2_1.2 SW2_2.1 SW2_2.2 SW3.1 SW3.2 SW3_1.1 SW3_1.2 SW3_2.1 SW3_2.2 SW4.1 SW4.2 SW4_1.1 SW4_1.2 SW4_2.1 SW4_2.2 U1.3 U1.5 U1_1.1 U1_1.2 U1_1.3 U1_1.4 U1_1.5 U1_1.6 U1_2.1 U1_2.2 U1_2.3 U1_2.4 U1_2.5 U1_2.6 U2.3 U2.5 U2_1.1 U2_1.2 U2_1.3 U2_1.4 U2_1.5 U2_1.6 U2_2.1 U2_2.2 U2_2.3 U2_2.4 U2_2.5 U2_2.6 U3.3 U3.5 U3_1.1 U3_1.2 U3_1.3 U3_1.4 U3_1.5 U3_1.6 U3_2.1 U3_2.2 U3_2.3 U3_2.4 U3_2.5 U3_2.6 U4.3 U4.5 U4_1.1 U4_1.2 U4_1.3 U4_1.4 U4_1.5 U4_1.6 U4_2.1 U4_2.2 U4_2.3 U4_2.4 U4_2.5 U4_2.6
copper on no net: | length 130303.1
  Bottom Layer w25: 12608.27,7659.25 12670.47,7659.25 12705.71,7624.02 12705.71,7573.82 ; 12608.27,7809.25 12671.46,7809.25 12710.63,7848.43 12710.63,7902.56 ; 12627.95,5518.5 12690.16,5518.5 12725.39,5483.27 12725.39,5433.07 ; 12627.95,5668.5 12691.14,5668.5 12730.32,5707.68 12730.32,5761.81 ; 15574.8,11309.84 15637.01,11309.84 15672.24,11274.61 15672.24,11224.41 ; 15574.8,11459.84 15637.99,11459.84 15677.17,11499.02 15677.17,11553.15
  Bottom Layer w30: 12224.41,7821.85 12287.01,7759.25 12419.29,7759.25 ; 12231.79,7656.99 12284.06,7709.25 12419.29,7709.25 ; 12244.09,5681.1 12306.69,5618.5 12438.98,5618.5 ; 12251.48,5516.24 12303.74,5568.5 12438.98,5568.5 ; 12278.05,7887.3 12356.1,7809.25 12419.29,7809.25 ; 12288.88,7592.03 12356.1,7659.25 12419.29,7659.25 ; 12297.74,5746.56 12375.79,5668.5 12438.98,5668.5 ; 12308.56,5451.28 12375.79,5518.5 12438.98,5518.5 ; 12503.7,6994.1 12535.2,6994.1 12631.89,6994.1 12731.69,7093.9 12986.22,7093.9 ; 12523.38,4853.35 12554.88,4853.35 12651.57,4853.35 12751.37,4953.15 13005.91,4953.15 ; 12608.27,7709.25 12697.24,7709.25 12720.08,7686.42 12768.7,7686.42 ; 12608.27,7759.25 12693.31,7759.25 12720.47,7786.42 12765.75,7786.42 ; 12627.95,5568.5 12716.93,5568.5 12739.76,5545.67 12788.39,5545.67 ; 12627.95,5618.5 12712.99,5618.5 12740.16,5645.67 12785.43,5645.67 ; 15190.95,11472.44 15253.54,11409.84 15385.83,11409.84 ; 15198.33,11307.58 15250.59,11359.84 15385.83,11359.84 ; 15244.59,11537.89 15322.64,11459.84 15385.83,11459.84 ; 15255.41,11242.62 15322.64,11309.84 15385.83,11309.84 ; 15470.23,10644.69 15501.73,10644.69 15598.42,10644.69 15698.22,10744.49 15952.76,10744.49 ; 15574.8,11359.84 15663.78,11359.84 15686.61,11337.01 15735.24,11337.01 ; 15574.8,11409.84 15659.84,11409.84 15687.01,11437.01 15732.28,11437.01
  Bottom Layer w50: 11438.01,7174.19 11438.01,7546.23 11438.01,7921.23 11438.01,8294.27 ; 11439,7173.2 11439,7096.44 v1(11678.15,6857.28) v1(11678.15,6733.27) ; 11457.7,5033.44 11457.7,5405.49 11457.7,5780.49 11457.7,6153.52 ; 11458.68,5032.45 11458.68,4955.69 v1(11697.83,4716.54) v1(11697.83,4592.52) ; 11626.97,7169.29 11627.95,7168.31 ; 11638.01,7546.23 11791.08,7546.23 11791.1,7368.35 ; 11638.01,7921.23 11792.11,7921.23 11793.07,7920.28 11794.29,7919.06 11794.29,7746.06 ; 11638.01,8294.27 11788.18,8294.27 11789.37,8293.07 11789.37,8110.63 ; 11639,7173.2 11790.09,7173.2 11790.09,6998.29 ; 11646.65,5028.54 11647.64,5027.56 ; 11657.7,5405.49 11810.76,5405.49 ; 11657.7,5780.49 11811.8,5780.49 11812.76,5779.53 11813.98,5778.31 11813.98,5605.32 ; 11657.7,6153.52 11807.86,6153.52 11809.06,6152.32 11809.06,5969.89 ; 11658.68,5032.45 11809.78,5032.45 11809.78,4857.55 ; 11810.79,5227.6 11810.79,5405.51 ; 11953.74,7746.06 12144.29,7746.06 ; 11955.71,7368.11 12141.34,7368.11 ; 11973.43,5605.32 12163.98,5605.32 ; 11975.39,5227.36 12161.02,5227.36 ; 12091.1,7546.26 12121.06,7546.26 12231.79,7656.99 ; 12091.1,8291.34 12203.74,8291.34 12245.08,8250 12245.08,7920.28 12278.05,7887.3 ; 12092.09,7175.2 12197.83,7175.2 12238.19,7215.55 12238.19,7541.34 12288.88,7592.03 ; 12093.07,7920.28 12125.98,7920.28 12224.41,7821.85 ; 12110.79,5405.51 12140.75,5405.51 12251.48,5516.24 ; 12110.79,6150.59 12223.43,6150.59 12264.76,6109.25 12264.76,5779.53 12297.74,5746.56 ; 12111.77,5034.45 12217.52,5034.45 12257.87,5074.8 12257.87,5400.59 12308.56,5451.28 ; 12112.76,5779.53 12145.67,5779.53 12244.09,5681.1 ; 12139.37,8110.63 12026.97,8110.63 11951.77,8035.43 11951.77,7064.96 12019.69,6997.05 12141.34,6997.05 12282.48,6997.05 12282.48,7081.69 12358.27,7157.48 12358.27,7312.01 12419.29,7373.03 12535.2,7373.03 ; 12159.06,5969.89 12046.66,5969.89 11971.46,5894.69 11971.46,4924.21 12039.37,4856.3 12161.02,4856.3 12302.17,4856.3 12302.17,4940.95 12377.95,5016.73 12377.95,5171.26 12438.98,5232.28 12554.88,5232.28 ; 12382.48,6997.05 12534.21,6997.05 ; 12402.17,4856.3 12553.9,4856.3 ; 12535.2,7194.88 12639.76,7194.88 12705.71,7260.83 12705.71,7573.82 ; 12536.18,8106.3 12639.76,8106.3 12710.63,8035.43 12710.63,7902.56 ; 12554.88,5054.13 12659.45,5054.13 12725.39,5120.08 12725.39,5433.07 ; 12555.87,5965.55 12659.45,5965.55 12730.32,5894.69 12730.32,5761.81 ; 12765.75,7786.42 12836.61,7786.42 v1@12966.54,7786.42 ; 12768.7,7686.42 12836.61,7686.42 13039.96,7686.42 13108.27,7618.11 13108.27,7048.23 13054.13,6994.1 12835.2,6994.1 v1@12835.2,6734.8 ; 12785.43,5645.67 12856.3,5645.67 v1@12986.22,5645.67 ; 12788.39,5545.67 12856.3,5545.67 13059.65,5545.67 13127.95,5477.36 13127.95,4907.48 13073.82,4853.35 12854.88,4853.35 v1@12854.88,4594.06 ; 12835.2,7194.88 12985.24,7194.88 ; 12835.2,7373.03 12967.52,7505.35 ; 12836.18,7786.85 12836.18,8106.3 ; 12854.88,5054.13 13004.92,5054.13 ; 12854.88,5232.28 12987.2,5364.61 ; 12855.87,5646.1 12855.87,5965.55 ; v1@12967.52,7577.76 12967.52,7505.35 ; v1@12967.52,7595.47 12967.52,7505.35 ; v1@12987.2,5437.01 12987.2,5364.61 ; v1@12987.2,5454.72 12987.2,5364.61 ; 14404.55,10824.78 14404.55,11196.82 14404.55,11571.82 14404.55,11944.86 ; 14405.53,10823.79 14405.53,10747.03 v1(14644.69,10507.87) v1(14644.69,10383.86) ; 14593.5,10819.88 14594.49,10818.9 ; 14604.55,11196.82 14757.61,11196.82 ; 14604.55,11571.82 14758.65,11571.82 14759.61,11570.87 14760.83,11569.65 14760.83,11396.65 ; 14604.55,11944.86 14754.71,11944.86 14755.91,11943.66 14755.91,11761.23 ; 14605.53,10823.79 14756.63,10823.79 14756.63,10648.89 ; 14757.64,11018.94 14757.64,11196.85 ; 14920.28,11396.65 15110.83,11396.65 ; 14922.24,11018.7 15107.87,11018.7 ; 15057.64,11196.85 15087.6,11196.85 15198.33,11307.58 ; 15057.64,11941.93 15170.28,11941.93 15211.61,11900.59 15211.61,11570.87 15244.59,11537.89 ; 15058.62,10825.79 15164.37,10825.79 15204.72,10866.14 15204.72,11191.93 15255.41,11242.62 ; 15059.61,11570.87 15092.52,11570.87 15190.95,11472.44 ; 15105.91,11761.23 14993.51,11761.23 14918.31,11686.02 14918.31,10715.55 14986.22,10647.64 15107.87,10647.64 15249.02,10647.64 15249.02,10732.28 15324.8,10808.07 15324.8,10962.6 15385.83,11023.62 15501.73,11023.62 ; 15349.02,10647.64 15500.75,10647.64 ; 15501.73,10845.47 15606.3,10845.47 15672.24,10911.42 15672.24,11224.41 ; 15502.72,11756.89 15606.3,11756.89 15677.17,11686.02 15677.17,11553.15 ; 15732.28,11437.01 15803.15,11437.01 v1@15933.07,11437.01 ; 15735.24,11337.01 15803.15,11337.01 16006.5,11337.01 16074.8,11268.7 16074.8,10698.82 16020.67,10644.69 15801.73,10644.69 v1@15801.73,10385.39 ; 15801.73,10845.47 15951.77,10845.47 ; 15801.73,11023.62 15934.06,11155.95 ; 15802.72,11437.44 15802.72,11756.89 ; v1@15934.06,11228.35 15934.06,11155.95 ; v1@15934.06,11246.06 15934.06,11155.95 ; 11224.41,8939.96 11224.41,10458.66 11224.41,11384.84 11304.13,11464.57 13513.78,11464.57 13611.22,11367.13 13611.22,8942.91 13513.78,8845.47 11318.9,8845.47 11224.41,8939.96 ; 11316.93,6701.77 11316.93,8325.79 11407.48,8416.34 13125.98,8416.34 13214.57,8327.76 13214.57,6694.88 13141.73,6622.05 11396.65,6622.05 11316.93,6701.77 ; 11336.61,4561.02 11416.34,4481.3 13161.42,4481.3 13234.25,4554.13 13234.25,6187.01 13145.67,6275.59 11427.17,6275.59 11336.61,6185.04 11336.61,4561.02 ; 14193.9,4284.45 14288.39,4189.96 16483.27,4189.96 16580.71,4287.4 16580.71,6711.61 16483.27,6809.06 14273.62,6809.06 14193.9,6729.33 14193.9,5803.15 14193.9,4284.45 ; 14211.61,7288.39 14211.61,8807.09 14211.61,9733.27 14291.34,9812.99 16500.99,9812.99 16598.43,9715.55 16598.43,7291.34 16500.98,7193.9 14306.1,7193.9 14211.61,7288.39 ; 14283.47,10352.36 14283.47,11976.38 14374.02,12066.93 16092.52,12066.93 16181.1,11978.35 16181.1,10345.47 16108.27,10272.64 14363.19,10272.64 14283.47,10352.36
  Bottom Layer w60: 11349.41,9825 11349.41,9285.43 11500,9134.84 ; 11349.41,9925 11416.54,9925 11503.94,9837.6 11503.94,9681.1 ; 11349.41,10025 11429.53,10025 11500,10095.47 11500,10252.95 ; 11349.41,10125 11349.41,10664.37 11500,10814.96 ; 11600,9134.84 11600,9091.38 11715.55,8975.83 ; 11600,10252.95 11600,10211.46 11716.54,10094.92 ; 11600,10814.96 11600,10774.45 11719.49,10654.96 ; 11603.94,9681.1 11603.94,9639.61 11715.55,9527.99 ; 11715.55,9275.83 11919.53,9275.83 11922.24,9278.54 ; 11715.55,9827.99 11921.02,9827.99 ; 11716.54,10394.92 11923.98,10394.92 ; 11719.49,10954.96 11924.96,10954.96 ; 11922.24,9178.54 11993.5,9178.54 12076.77,9261.81 12076.77,9725.79 ; 11923.23,9725.79 12076.77,9725.79 ; 11925.2,10293.7 12076.77,10293.7 ; 11927.17,10852.76 12072.44,10852.76 ; 11930.32,11123.82 11930.32,11343.5 ; 12030.32,11123.82 12030.32,11343.5 ; 12130.32,11123.82 12130.32,11343.5 ; 12222.24,9078.54 12629.72,9078.54 12726.18,9175 12726.18,9278.54 ; 12222.24,9278.54 12370.51,9278.54 ; 12223.23,9625.79 12641.54,9625.79 12724.21,9708.46 12724.21,9822.83 ; 12223.23,9825.79 12371.5,9825.79 12373.03,9827.32 ; 12225.2,10193.7 12645.47,10193.7 12726.18,10274.41 12726.18,10391.73 ; 12225.2,10393.7 12370.63,10393.7 ; 12227.17,10752.76 12641.54,10752.76 12727.17,10838.39 12727.17,10951.77 ; 12227.17,10952.76 12369.53,10952.76 12373.03,10956.26 ; 12230.32,11154.54 12230.32,11343.5 ; 12231.1,11342.72 12231.1,11123.03 12231.1,11095.28 12076.77,10940.95 12076.77,10293.7 ; 12373.03,8981.06 12516.06,8981.06 ; 12373.03,9527.32 12513.47,9527.32 ; 12373.03,10091.3 12517.05,10091.3 12518.7,10092.95 v1@12641.18,10092.95 ; 12373.03,10656.26 12517.4,10656.26 ; 12515.2,9525.59 12516.73,9524.06 v1@12639.33,9524.06 ; 12516.73,9824.06 12516.73,9909.45 12571.85,9964.57 12826.18,9964.57 12826.18,10391.73 ; 12517.72,8982.72 v1@12639.21,8982.72 ; 12517.72,9282.72 12517.72,9354.33 12573.82,9410.43 12824.21,9410.43 ; 12517.72,10655.95 v1(12641.73,10655.95) ; 12517.72,10955.95 12702.52,11140.75 13332.68,11140.75 ; 12518.7,10392.95 12518.7,10471.46 12575.79,10528.54 12827.17,10528.54 12827.17,10392.72 ; 12824.21,9962.6 12824.21,9822.83 12824.21,9410.43 ; 12826.18,9278.54 12824.21,9280.51 12824.21,9410.43 ; 12827.17,10530.51 12827.17,10951.77 12827.17,11140.16 ; 12924.21,9822.83 12924.21,9691.93 13010.83,9605.32 v1(13010.83,9523.62) 13329.53,9523.62 ; 12926.18,9278.54 12926.18,9163.39 13010.83,9078.74 v1(13010.83,8985.24) 13327.95,8985.24 ; 12926.18,10391.73 12926.18,10278.54 13010.83,10193.9 v1(13010.83,10085.63) 13326.97,10085.63 ; 12927.17,10951.77 12927.17,10834.65 13010.83,10750.98 v1(13010.83,10655.95) 13326.14,10655.95 ; 13329.72,9187.01 13494.09,9351.38 13494.09,10288.39 ; 13329.72,9723.43 13493.11,9723.43 ; 13329.72,10288.39 13494.09,10288.39 ; 13329.72,10852.36 13492.13,10852.36 ; 13332.68,11340.75 13494.09,11179.33 13494.09,10288.39 ; 14336.61,8173.43 14336.61,7633.86 14487.2,7483.27 ; 14336.61,8273.43 14403.74,8273.43 14491.14,8186.02 14491.14,8029.53 ; 14336.61,8373.43 14416.73,8373.43 14487.2,8443.9 14487.2,8601.38 ; 14336.61,8473.43 14336.61,9012.8 14487.2,9163.39 ; 14587.2,7483.27 14587.2,7439.8 14702.76,7324.25 ; 14587.2,8601.38 14587.2,8559.88 14703.74,8443.35 ; 14587.2,9163.39 14587.2,9122.87 14706.69,9003.39 ; 14591.14,8029.53 14591.14,7988.03 14702.76,7876.42 ; 14702.76,7624.25 14906.73,7624.25 14909.45,7626.97 ; 14702.76,8176.42 14908.23,8176.42 ; 14703.74,8743.35 14911.18,8743.35 ; 14706.69,9303.39 14912.17,9303.39 ; 14909.45,7526.97 14980.71,7526.97 15063.98,7610.24 15063.98,8074.21 ; 14910.43,8074.21 15063.98,8074.21 ; 14912.4,8642.13 15063.98,8642.13 ; 14914.37,9201.18 15059.65,9201.18 ; 14917.52,9472.24 14917.52,9691.93 ; 15017.52,9472.24 15017.52,9691.93 ; 15117.52,9472.24 15117.52,9691.93 ; 15209.45,7426.97 15616.93,7426.97 15713.39,7523.43 15713.39,7626.97 ; 15209.45,7626.97 15357.72,7626.97 ; 15210.43,7974.21 15628.74,7974.21 15711.42,8056.89 15711.42,8171.26 ; 15210.43,8174.21 15358.7,8174.21 15360.24,8175.75 ; 15212.4,8542.13 15632.68,8542.13 15713.39,8622.83 15713.39,8740.16 ; 15212.4,8742.13 15357.84,8742.13 ; 15214.37,9101.18 15628.74,9101.18 15714.37,9186.81 15714.37,9300.2 ; 15214.37,9301.18 15356.73,9301.18 15360.24,9304.69 ; 15217.52,9502.97 15217.52,9691.93 ; 15218.31,9691.14 15218.31,9471.46 15218.31,9443.7 15063.98,9289.37 15063.98,8642.13 ; 15360.24,7329.49 15503.27,7329.49 ; 15360.24,7875.75 15500.67,7875.75 ; 15360.24,8439.72 15504.25,8439.72 15505.91,8441.38 v1@15628.39,8441.38 ; 15360.24,9004.69 15504.61,9004.69 ; 15502.4,7874.02 15503.94,7872.48 v1@15626.54,7872.48 ; 15503.94,8172.48 15503.94,8257.87 15559.06,8312.99 15813.39,8312.99 15813.39,8740.16 ; 15504.92,7331.14 v1@15626.42,7331.14 ; 15504.92,7631.14 15504.92,7702.76 15561.02,7758.86 15811.42,7758.86 ; 15504.92,9004.37 v1(15628.94,9004.37) ; 15504.92,9304.37 15689.72,9489.17 16319.88,9489.17 ; 15505.91,8741.38 15505.91,8819.88 15562.99,8876.97 15814.37,8876.97 15814.37,8741.14 ; 15811.42,8311.02 15811.42,8171.26 15811.42,7758.86 ; 15813.39,7626.97 15811.42,7628.94 15811.42,7758.86 ; 15814.37,8878.94 15814.37,9300.2 15814.37,9488.58 ; 15911.42,8171.26 15911.42,8040.35 15998.03,7953.74 v1(15998.03,7872.05) 16316.73,7872.05 ; 15913.39,7626.97 15913.39,7511.81 15998.03,7427.17 v1(15998.03,7333.66) 16315.16,7333.66 ; 15913.39,8740.16 15913.39,8626.97 15998.03,8542.32 v1(15998.03,8434.06) 16314.17,8434.06 ; 15914.37,9300.2 15914.37,9183.07 15998.03,9099.41 v1(15998.03,9004.37) 16313.35,9004.37 ; 16316.93,7535.43 16481.3,7699.8 16481.3,8636.81 ; 16316.93,8071.85 16480.32,8071.85 ; 16316.93,8636.81 16481.3,8636.81 ; 16316.93,9200.79 16479.33,9200.79 ; 16319.88,9689.17 16481.3,9527.76 16481.3,8636.81 ; 12076.77,9725.79 12076.77,10293.7 ; 15063.98,8074.21 15063.98,8642.13
  other v1: 12853.35,4592.52 12853.35,4714.57 12988.19,5455.71 12987.2,5644.69 12833.66,6733.27 12833.66,6855.32 15628.94,7333.66 12968.5,7596.46 12967.52,7785.43 15628.94,7870.08 15628.94,8441.93 12641.73,8985.24 12641.73,9521.65 12641.73,10093.5 15800.2,10383.86 15800.2,10505.91 15935.04,11247.05 15934.06,11436.02

## Polygon pours and split planes (outlines as drawn)
no net on Bottom Layer "Bottom Layer-No Net" (solid, shelved, pour order 4): 4898.62,5102.36 4898.62,3217.52 4990.16,3125.98 4997.05,3132.87 6868.11,3132.87 6868.11,3155.51 6950.79,3238.19 6944.88,3244.09 6944.88,5640.75 6944.88,5657.48 6872.05,5730.32 6865.16,5737.2 5000.98,5737.2 5000.98,5730.32 4891.73,5621.06 4887.8,5617.13 4887.8,5092.52 4887.8,5082.68 4901.57,5068.9 4901.57,5085.63

## Other copper
Bottom Layer:
  text "DO AN 1" at 15886.81,11877.95 h75
  text "15141033" at 11819.88,11225.39 h75
  text "TRAN ANH KIET" at 13240.16,11225.39 h75
  text "TRAN ANH KIET" at 15691.93,10464.57 h75
  text "15141033" at 15505.91,10341.54 h75
  text "15141033" at 14807.09,9573.82 h75
  text "TRAN ANH KIET" at 16227.36,9573.82 h75
  text "DO AN 1" at 12920.28,8227.36 h75
  text "TRAN ANH KIET" at 12725.39,6813.98 h75
  text "15141033" at 12539.37,6690.95 h75
  text "15141033" at 14789.37,6569.88 h75
  text "TRAN ANH KIET" at 16209.65,6569.88 h75
  text "DO AN 1" at 12939.96,6086.61 h75
  text "TRAN ANH KIET" at 12745.08,4673.23 h75
  text "15141033" at 12559.06,4550.2 h75